# Altium PCB UC-527.PcbDoc
Units mil, origin at the board's own origin, x right, y up, seen from the top; angles counter-clockwise.
Board outline 984.25 x 944.88 mil, 2 copper layers (Top Layer, Bottom Layer); 27 components, 23 nets, 104 pads, 71 vias.
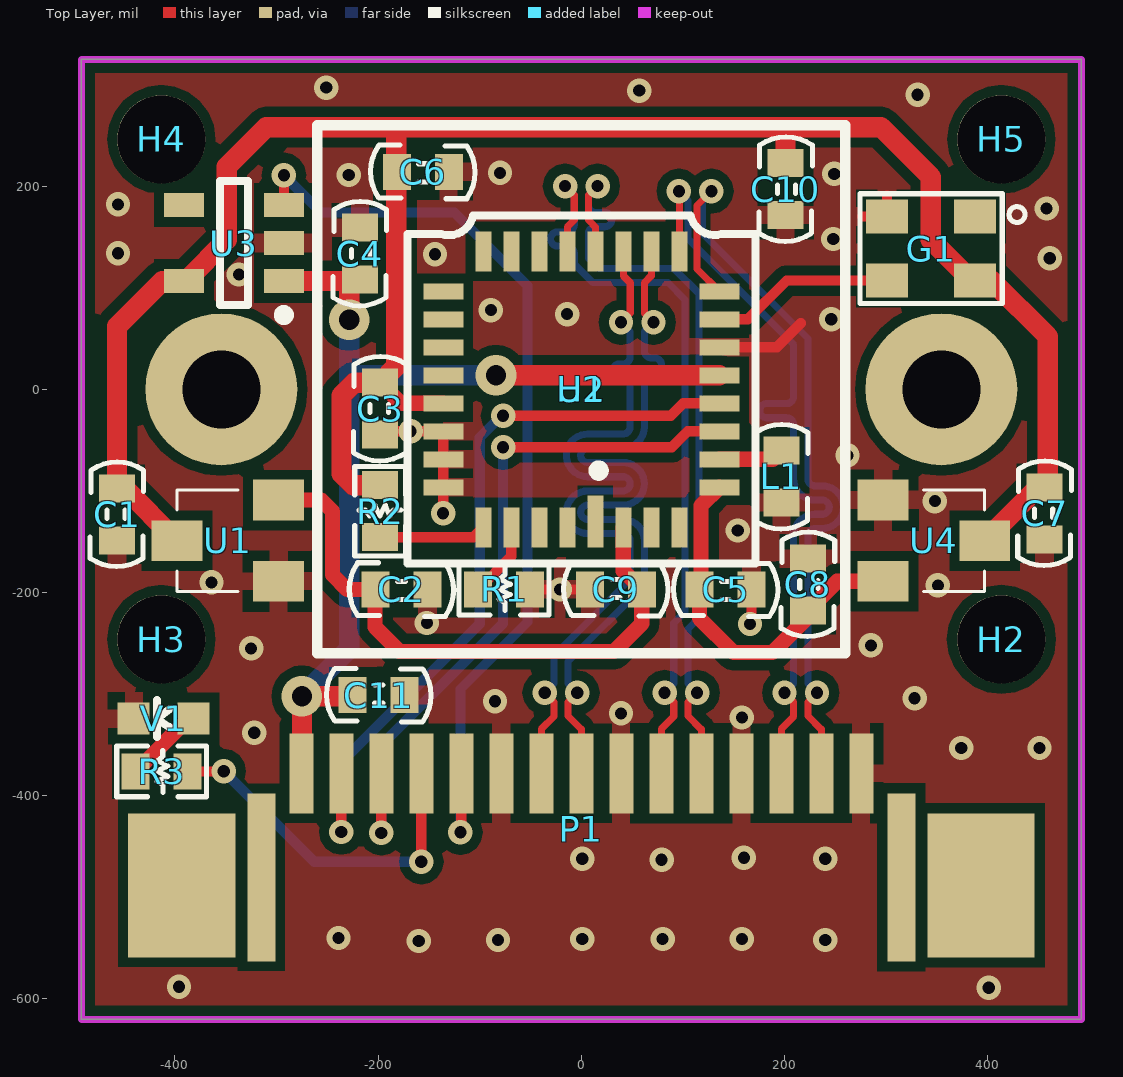
[diagram p0: Top Layer view]
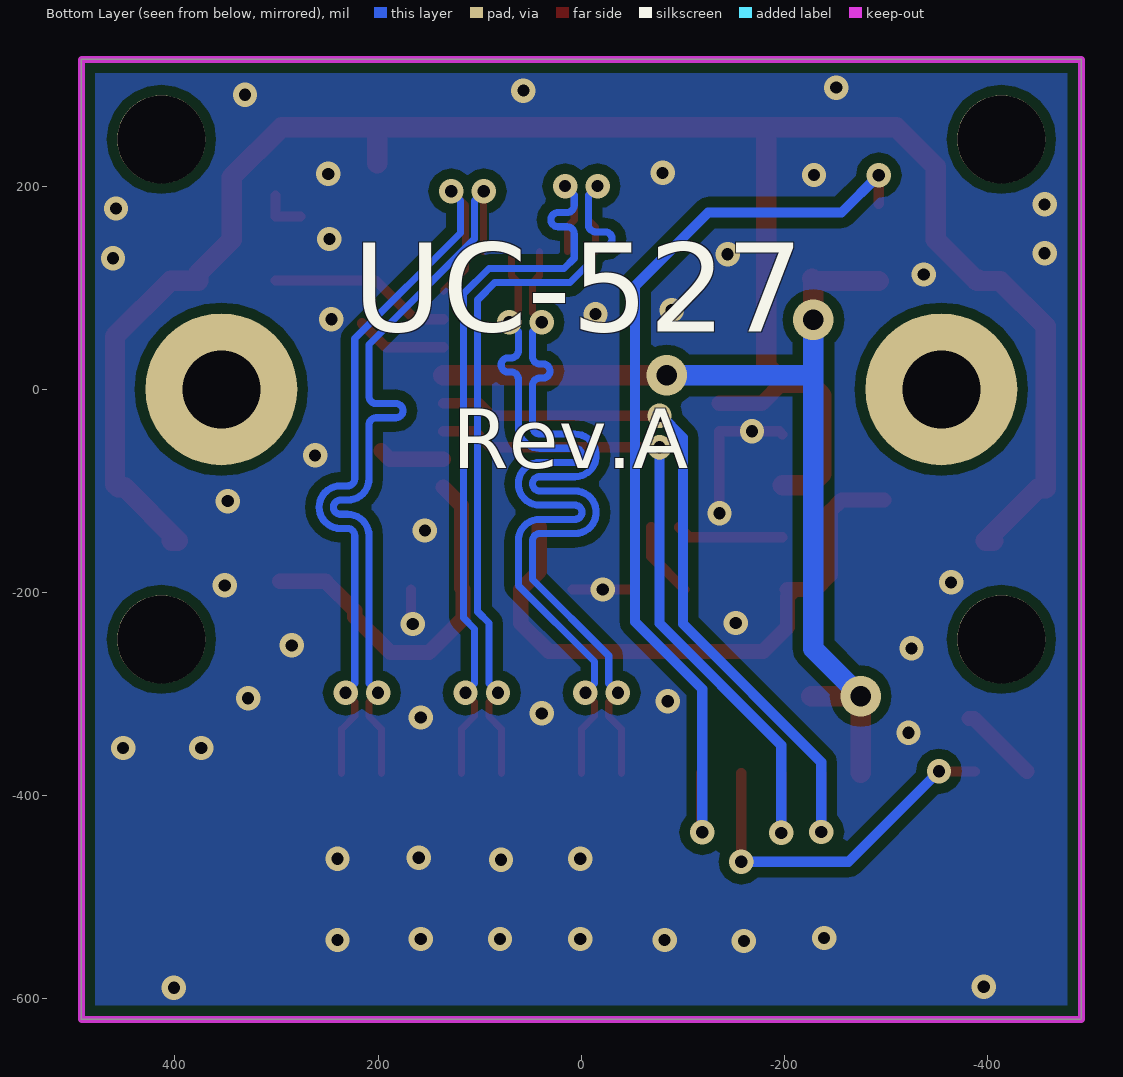
[diagram p1: Bottom Layer view, seen from below]

## Layer stack, top to bottom
Top Layer: signal copper 1.4
Dielectric: core 12.6, FR-4, Dk 4.8
Bottom Layer: signal copper 1.4

## Board outline
-492.13,-620.08 492.13,-620.08 492.13,324.8 -492.13,324.8

## Design rules (kind name [scope] priority, off if disabled: settings)
Clearance 板边 [OnLayer('Keep-Out Layer')] p1: gap=10
Clearance 固定孔 [(InComponent('H*'))] p2: gap=10
Clearance 差分对与其它走线 [(InDifferentialPairClass('All Differential Pairs')) vs not(InDifferentialPairClass('All Differential Pairs'))] p3 off: gap=21
Clearance 覆铜 [InPolygon] p4: gap=10
Clearance 普通间距 [All] p5: gap=6
ComponentClearance [All] p1 off: gap=10 collisioncheckmode=3 verticalgap=10 showdistances=FALSE
DiffPairsRouting [(InDifferentialPairClass('All Differential Pairs'))] p1: maxlimit=8 minlimit=7 mostfreqgap=7 maxuncoupledlength=500
FabricationTestPointUsage TestPointUsage [All] p1: valid=0 allowmultiple=FALSE
FabricationTestpoint Testpoint [All] p1: side=3 testpointundercomponent=TRUE minsize=40 maxsize=100 preferedsize=60 minholesize=0 maxholesize=40 preferedholesize=32 testpointgrid=1 allowsidetop=TRUE allowsidebottom=TRUE usegrid=TRUE gridtolerance=0.01
FanoutControl Fanout_LCC [All] p1 off: bgadir=Out bgaviamode=Centered fanoutstyle=Auto fanoutdirection=Alternating viagrid=1 // Protel DXP Scope 1 Expression Was: IsLCC   Fanout_LCC (Default Rule)
FanoutControl Fanout_BGA [All] p2 off: bgadir=Out bgaviamode=Centered fanoutstyle=Auto fanoutdirection=Alternating viagrid=1 // Protel DXP Scope 1 Expression Was: IsBGA   Fanout_BGA (Default Rule)
FanoutControl Fanout_SOIC [All] p3 off: bgadir=Out bgaviamode=Centered fanoutstyle=Auto fanoutdirection=Alternating viagrid=1 // Protel DXP Scope 1 Expression Was: IsSOIC   Fanout_SOIC (Default Rule)
FanoutControl Fanout_Default [All] p4: bgadir=Out bgaviamode=Centered fanoutstyle=Auto fanoutdirection=Alternating viagrid=1 // Fanout_Default (Default Rule)
FanoutControl Fanout_Small [All] p5 off: bgadir=Out bgaviamode=Centered fanoutstyle=Auto fanoutdirection=Alternating viagrid=1 // Protel DXP Scope 1 Expression Was: (CompPinCount < 5)   Fanout_Small (Default Rule)
HoleSize [All] p1: absolutevalues=TRUE maxlimit=130 minlimit=1 maxpercent=80.000 minpercent=20.000
Length [(InDifferentialPairClass('All Differential Pairs'))] p1 off: maxlimit=1120 minlimit=1080
MatchedLengths "within differential pair" [All] p1: tolerance=5 checknetsindiffpair=TRUE checkdiffpairvsdiffpair=FALSE checkothers=FALSE
MatchedLengths "between differential pairs" [All] p2: tolerance=5 checknetsindiffpair=FALSE checkdiffpairvsdiffpair=TRUE checkothers=FALSE
PlaneClearance [All] p1: clearance=15
PlaneConnect padPowerPlane [ispad] p1: planeconnectstyle=Relief reliefexpansion=15 reliefentries=4 reliefconductorwidth=15 reliefairgap=15
PlaneConnect viaPowerPlane [isvia] p2: planeconnectstyle=Direct reliefexpansion=15 reliefentries=4 reliefconductorwidth=15 reliefairgap=10
PolygonConnect 过孔全连接 [ISVIA] p1: connectstyle=Direct reliefconductorwidth=10 reliefentries=4 polygonreliefangle="90 Angle"
PolygonConnect [All] p2: connectstyle=Relief reliefconductorwidth=18 reliefentries=4 polygonreliefangle="90 Angle"
RoutingCorners 差分对 [(InNet('CAM_C_N') OR InNet('CAM_C_P') OR InNet('CAM_D0_N') OR InNet('CAM_D0_P') OR InNet('CAM_D1_N') OR InNet('CAM_D1_P'))] p1: cornerstyle=Round minsetback=100 maxsetback=100
RoutingCorners [All] p2: cornerstyle=45-Degree minsetback=100 maxsetback=100
RoutingPriority [(InDifferentialPairClass('All Differential Pairs'))] p1: routingpriority=0
RoutingVias [All] p1: holewidth=12 width=24 viastyle="Through Hole" minholewidth=12 minwidth=24 maxholewidth=236.22 maxwidth=236.22
SilkToSilkClearance [All] p1 off: silktosilkclearance=10
SilkscreenOverComponentPads [All] p1 off: minsilkscreentomaskgap=10
SolderMaskExpansion [All] p1: expansion=4
Width [All] p1: maxlimit=80 minlimit=6 preferedwidth=6
12 further rules are at their usual default settings.

## Classes and differential pairs
differential pair CAM_C: +CAM_C_P -CAM_C_N
differential pair CAM_D0: +CAM_D0_P -CAM_D0_N
differential pair CAM_D1: +CAM_D1_P -CAM_D1_N

## Components (designator, comment, footprint, x,y, rotation, side; value= is the part's Value field where it differs from the comment)
C1 "1u" 0603S-CAP -457,-123 r90 top
C2 "1u" 0603S-CAP -177,-197 r180 top
C3 "100n" 0603S-CAP -198,-19 r90 top
C4 "1u" 0603S-CAP -218,133.59 r270 top
C5 "100n" 0603S-CAP 142,-197 r180 top
C6 "1u" 0603S-CAP -156,214 r180 top
C7 "1u" 0603S-CAP 456,-122 r90 top
C8 "1u" 0603S-CAP 223,-192 r270 top
C9 "100n" 0603S-CAP 34,-197 r0 top
C10 "100n" 0603S-CAP 201,197 r270 top
C11 "1u" 0603S-CAP -199.41,-301 r0 top
G1 "27MHz" 爱普生晶振3.2×2.5MM 301,107.01 r180 top
H1 "FixedHole" 摄像头安装孔_18/20 0,0 r0 top locked
H2 "FixedHole" 固定孔 413.39,-246.06 r0 top
H3 "FixedHole" 固定孔 -413.39,-246.06 r0 top
H4 "FixedHole" 固定孔 -413.39,246.06 r0 top
H5 "FixedHole" 固定孔 413.39,246.06 r0 top
L1 "磁珠" L0603 197,-86 r270 top
P1 "Header 15" OV5647_MIPI 0,-433.07 r0 top locked
R1 "4.7K" 0603S-RES -76,-197.02 r180 top
R2 "10k" 0603S-RES -198,-120 r270 top
R3 "1.5k" 0603S-RES -413,-376 r180 top (schematic designator R6)
U1 "ME6206A15M3G-65E9-1.5V" SOT23-3 -298,-189 r270 top locked
U2 "OV5647" OV5647 0,0 r180 top locked
U3 "ME6211-3.0" SOT23-5 -342,144 r180 top (schematic designator U4)
U4 "ME6206A28M3G-65X6-2.8V" SOT23-3 297,-109 r90 top (schematic designator U3)
V1 "RUN" LED-0603 -411,-324 r90 top

## Footprints (in the part's own frame and the unit in brackets; to place one, negate y for a bottom-side part, rotate by r counter-clockwise, add the part's x,y. Pads: shape width x height; smd on the part's side, far side on the other; paste and mask are expansions set on the pad)
0603S-CAP [mm]
  rect 0.7x0.9 smd: 1(-0.65,0) 2(0.65,0)
  silkscreen extent -1.31,-0.67 1.31,0.67
0603S-RES [mm]
  rect 0.7x0.9 smd: 1(-0.65,0) 2(0.65,0)
  silkscreen extent -1.12,-0.64 1.12,0.64
L0603 [mm]
  rect 0.7x0.9 smd: 1(0.65,0) 2(-0.65,0)
  silkscreen extent -1.31,-0.67 1.31,0.67
LED-0603 [mm]
  rect 0.8x0.8 smd: 1(0,-0.75) 2(0,0.75)
  silkscreen extent -0.46,-0.14 0.46,0.17
OV5647 [mm]
  rect 0.4x1.3 smd: 1(-0.35,3.3)
  rect 0.4x1 smd: 2(-1.05,3.45) 3(-1.75,3.45) 4(-2.45,3.45) 13(-2.45,-3.45) 14(-1.75,-3.45) 15(-1.05,-3.45) 16(-0.35,-3.45) 17(0.35,-3.45) 18(1.05,-3.45) 19(1.75,-3.45) 20(2.45,-3.45) 29(2.45,3.45) 30(1.75,3.45) 31(1.05,3.45) 32(0.35,3.45)
  rect 1x0.4 smd: 5(-3.45,2.45) 6(-3.45,1.75) 7(-3.45,1.05) 8(-3.45,0.35) 9(-3.45,-0.35) 10(-3.45,-1.05) 11(-3.45,-1.75) 12(-3.45,-2.45) 21(3.45,-2.45) 22(3.45,-1.75) 23(3.45,-1.05) 24(3.45,-0.35) 25(3.45,0.35) 26(3.45,1.05) 27(3.45,1.75) 28(3.45,2.45)
  silkscreen extent -4.35,-4.35 4.35,4.35
OV5647_MIPI [mm]
  rect 2.68x3.6 smd: 0(-9.99,-1.4) 0(9.99,-1.4)
  rect 0.7x4.2 smd: 0(-8,-1.2) 0(8,-1.2)
  rect 0.6x2 smd: 1(-7,1.4) 2(-6,1.4) 3(-5,1.4) 4(-4,1.4) 5(-3,1.4) 6(-2,1.4) 7(-1,1.4) 8(0,1.4) 9(1,1.4) 10(2,1.4) 11(3,1.4) 12(4,1.4) 13(5,1.4) 14(6,1.4) 15(7,1.4)
SOT23-3 [mil]
  rect 40x50 smd: 1(0,0) 2(-80,0) 3(-40,-100)
  silkscreen extent -90,-100 10,-40, body extent -99,-96 19,2, height 42
SOT23-5 [mm] "SOT23, 5-Leads, Body 3.1x3.0mm (max), Pitch 0.95mm, IPC Medium Density"
  rect 1x0.6 smd: 1(-1.25,0.95) 2(-1.25,0) 3(-1.25,-0.95) 4(1.25,-0.95) 5(1.25,0.95)
  silkscreen extent -1.38,-1.55 0.35,1.92, body extent -0.9,-1.55 0.9,1.55, height 1.1
固定孔 [mm]
  round 2.2 hole 2.2: 1(0,0)
摄像头安装孔_18/20 [mm]
  round 3.8 hole 1.95: 1(-9,0) 1(9,0)
爱普生晶振3.2×2.5MM [mm]
  rect 1.05x0.85 smd: 1(-2.2,-1.6) 2(0,-1.6) 3(0,0) 4(-2.2,0)
  Top Layer pour cut-out: -2.878,0.572 -2.878,-2.172 0.678,-2.172 0.678,0.572
  silkscreen extent -3.44,-2.17 0.68,0.57

## Part data
C1 C2 C3 C4 C5 C6 C7 C8 C9: library part Cap, "50V/8.2u/0805"
C10 C11: library part CAP, "RC=1206"
G1: library part CTY4-B
H1 H2 H3 H4 H5: library part 固定孔
L1: library part RES
P1: "Header, 15-Pin"
R1 R2 R3: library part Res2, "Resistor"
U1 U4: library part 65e9
U3: library part PAM3101DAB150
V1: library part LED0, "Typical INFRARED GaAs LED"

## Via types
v1: diameter 24, hole 12, Top Layer to Bottom Layer, tented both sides, 68 vias
v2: diameter 40, hole 20, Top Layer to Bottom Layer, tented both sides, 3 vias

## Nets (pads, with @x,y where several pads share a name; then routed paths per layer and width w, separated by ;. In a path a pad name is that pad's centre, name@x,y a point inside that pad or via, vN(x,y) a via of type N, cw(c..) or ccw(c..) an arc to the next point about the centre after c; other vN are vias at no path point)
+3V3: C4.2 C11.1 P1.1 U2.9 U3.1 | length 983.1
  Top Layer w20: U3.1 -229.4,106.6 C4.2@-228.4,107.6 ; P1.1@-275,-377.36 v2(-275,-302) C11.1@-226,-302 ; v2(-228.4,68.4) C4.2@-228.4,107.6 ; C4.2@-227,109 C4.2@-228.4,107.6 ; v2(-84,13.78) U2.9
  Bottom Layer w20: v2(-275,-302) -228.4,-255.4 v2(-228.4,68.4) ; -227.18,13.78 v2(-84,13.78)
AGND: L1.2 U2.6 | length 64.7
  Top Layer w15: U2.6 188.51,-68.9 L1.2
AVDD(+2V8): C5.2 C8.2 U2.5 U4.2 | length 364.2
  Top Layer w15: U2.5 117.83,-114.45 117.83,-195.58 C5.2 116.41,-225.41 150,-259 188,-259 223,-224 C8.2 251.59,-189 U4.2
CAM_C_N: P1.8 U2.14 | length 792.5
  Top Layer w7: v1(-4,-298.63) -13,-307.63 -13,-321.63 -0.37,-334.26 0,-334.26 P1.8 ; U2.14 68.9,111.74 62.12,104.96 62.12,74.88 v1(71,66)
  Bottom Layer w7: v1(-4,-298.63) -13,-289.63 -13,-268 62,-193 62,-149 ccw(c41,-149) 41,-128 6.35,-128 cw(c6.35,-121) 6.35,-114 41,-114 ccw(c41,-93) 62,-93 ccw(c41,-93) 41,-72 6.35,-72 cw(c6.35,-65) 6.35,-58 41,-58 ccw(c41,-37) 62,-37 62,10 cw(c69,10) 69,17 71.95,17 ccw(c71.95,24) 78.95,24 ccw(c71.95,24) 71.95,31 69,31 cw(c69,38) 62,38 62,57 v1(71,66)
CAM_C_P: P1.7 U2.15 | length 792.5
  Top Layer w7: P1.7 -39.37,-334.26 -27,-321.89 -27,-307.63 v1(-36,-298.63) ; v1(39,66) 48.12,75.12 48.12,104.96 41.34,111.74 U2.15
  Bottom Layer w7: v1(-36,-298.63) -27,-289.63 -27,-262.2 48,-187.2 48,-149 ccw(c41,-149) 41,-142 6.35,-142 cw(c6.35,-121) 6.35,-100 41,-100 ccw(c41,-93) 48,-93 ccw(c41,-93) 41,-86 6.35,-86 cw(c6.35,-65) 6.35,-44 41,-44 ccw(c41,-37) 48,-37 48,4 ccw(c41,4) 41,11 37.86,11 cw(c37.86,18) 30.86,18 cw(c37.86,18) 37.86,25 41,25 ccw(c41,32) 48,32 48,57 v1(39,66)
CAM_D0_N: P1.14 U2.12 | length 792.5
  Top Layer w7: v1(128,195) 113.83,180.83 113.83,118.45 U2.12 ; v1(232,-298.63) 223,-307.63 223,-321.63 235.63,-334.26 236.22,-334.26 P1.14
  Bottom Layer w7: v1(128,195) 119,186 119,154 223,50 223,-88 ccw(c230,-88) 230,-95 237,-95 cw(c237,-116) 258,-116 cw(c237,-116) 237,-137 230,-137 ccw(c230,-144) 223,-144 223,-289.63 v1(232,-298.63)
CAM_D0_P: P1.13 U2.13 | length 792.5
  Top Layer w7: v1(96,195) 96.46,194.54 U2.13 ; P1.13 196.85,-334.26 209,-322.11 209,-307.63 v1(200,-298.63)
  Bottom Layer w7: v1(96,195) 105,186 105,148.2 209,44.2 209,-7 cw(c202,-7) 202,-14 182.52,-14 ccw(c182.52,-21) 175.52,-21 ccw(c182.52,-21) 182.52,-28 202,-28 cw(c202,-35) 209,-35 209,-88 ccw(c230,-88) 230,-109 237,-109 cw(c237,-116) 244,-116 cw(c237,-116) 237,-123 230,-123 ccw(c230,-144) 209,-144 209,-289.63 v1(200,-298.63)
CAM_D1_N: P1.11 U2.16 | length 792.5
  Top Layer w7: U2.16 13.78,159.74 7,166.52 7,191 v1(16,200) ; v1(114,-298.63) 105,-307.63 105,-321.63 117.63,-334.26 118.11,-334.26 P1.11
  Bottom Layer w7: v1(16,200) 7,191 7,181 ccw(c14,181) 14,174 22.97,174 cw(c22.97,167) 29.97,167 cw(c22.97,167) 22.97,160 14,160 ccw(c14,153) 7,153 7,129 17,119 91,119 116,94 116,-224.8 105,-235.8 105,-289.63 v1(114,-298.63)
CAM_D1_P: P1.10 U2.17 | length 792.5
  Top Layer w7: v1(-16,200) -7,191 -7,166.52 -13.78,159.74 U2.17 ; P1.10 78.74,-334.26 91,-322 91,-307.63 v1(82,-298.63)
  Bottom Layer w7: v1(-16,200) -7,191 -7,162 cw(c-14,162) -14,155 -23.28,155 ccw(c-23.28,148) -30.28,148 ccw(c-23.28,148) -23.28,141 -14,141 cw(c-14,134) -7,134 -7,123.2 11.2,105 85.2,105 102,88.2 102,-219 91,-230 91,-289.63 v1(82,-298.63)
DGND: C1.1 C2.1 C3.1 C4.1 C5.1 C6.1 C7.1 C8.1 C9.1 C10.2 C11.2 G1.2 L1.1 P1.6 P1.9 P1.12 P1.15 R1.1 U1.1 U2.10 U2.26 U2.27 U2.28 U3.2 U4.1 V1.2 | length 374
  Top Layer w10: C3.1 -194.75,-41.34 v1(-168,-41.34) U2.26 U2.27 U2.28 ; v1@-135.83,-121.83 U2.28 ; U2.28@-135.83,-97.83 U2.28 ; R1.1 v1(-21,-197.02) C9.1@8.39,-197.02 ; U2.10 192.38,41.34 216,64.96 ; v1(166,-231) 167.59,-229.41 C5.1 ; 276.31,170 G1.2 301,190.5
  other v1: 401,-589 -396,-588 -160,-543 -82,-542 240,-542 1,-541 80,-541 158,-541 -239,-540 79,-463 1,-462 240,-462 160,-461 374,-353 451,-353 -322,-338 158,-323 39,-319 -85,-307 328,-304 -325,-255 285,-252 -152,-230 351,-193 -364,-190 154,-139 -136,-122 348,-110 262,-65 246,69 -14,74 -89,78 -337,113 461,129 -144,133 -456,134 248,148 458,178 -456,182 -229,211 249,212 -80,213 331,290 57,294 -251,297
DOVDD(+3V): C1.2 C3.2 C6.2 C7.2 C10.1 G1.4 R2.1 U1.3 U2.25 U3.5 U4.3 | length 2175.4
  Top Layer w15: C3.2 -177.63,-13.78 U2.25
  Top Layer w20: U1.3@-405.41,-149 U1.3 -449.59,-97.41 C1.2 -457,62 -412.4,106.6 U3.5 -389.4,106.6 U3.5@-388,108 ; U3.5@-391.21,108 U3.5@-388,108 ; R2.1 -224.59,-94.41 -236,-83 -236,-6 -223.41,6.59 C3.2 -182,22.59 -182,214 -182,256 ; C10.1 201,256 ; U4.3@403.41,-149 U4.3 449.59,-96.41 C7.2 459,-93.41 459,52 403.99,107.01 G1.4 376.99,107.01 376.99,114.01 344,147 344,209 295,258 -310,258 -349,219 -349,147 U3.5@-388,108
DVDD(+1V5): C2.2 C9.2 U1.2 U2.2 | length 604.8
  Top Layer w15: U1.2@-287,-109 U1.2 -256,-109 -245,-120 -245,-182.5 -230.5,-197 C2.2 ; C2.2@-209.5,-197.5 -206.3,-200.71 -203,-204 -203,-234 -179,-258 32,-258 59.59,-230.41 C9.2 41.34,-178.75 U2.2
FREX: U2.31
LED_EN: P1.4 R3.1 | length 353.8
  Top Layer w10: R3.1 v1(-352,-376) ; v1(-157.48,-465) P1.4
  Bottom Layer w10: v1(-352,-376) -263,-465 v1(-157.48,-465)
NetR3_2: R3.2 V1.1 | length 78.6
  Top Layer w15: R3.2 -386.59,-324 V1.1
POWER_EN: P1.5 U3.3 | length 935.7
  Top Layer w10: U3.3@-292.79,182.4 v1(-292.79,210.79) ; v1@-118.11,-435.11 P1.5
  Bottom Layer w10: v1(-292.79,210.79) -256,174 -125,174 -53,102 -53,-229 -119,-295 v1(-119,-436)
PWDN: R1.2 U2.30 | length 74.7
  Top Layer w10: R1.2 -68.9,-164.32 U2.30
RESET_B: R2.2 U2.29 | length 105.6
  Top Layer w10: R2.2 -106.22,-145.59 U2.29
SIOC: P1.3 U2.7 | length 707.3
  Top Layer w10: v1(-196.85,-436.63) P1.3 ; v1(-77,-57) 89,-57 104.66,-41.34 U2.7
  Bottom Layer w10: v1(-196.85,-436.63) -196.85,-350.22 -77,-230.37 v1(-77,-57)
SIOD: P1.2 U2.8 | length 752.2
  Top Layer w10: v1(-236.22,-435.7) P1.2 ; v1(-77,-26) 88,-26 100.22,-13.78 U2.8
  Bottom Layer w10: v1(-236.22,-435.7) -236.22,-366.97 -100,-230.75 -100,-47.47 -78.53,-26 v1(-77,-26)
STROBE: U2.32
VSYNC: U2.23
XVCLK: G1.3 U2.11 | length 181
  Top Layer w10: U2.11 163.9,68.9 202.01,107.01 G1.3
pads on no net: G1.1 H1.1 H2.1 H3.1 H4.1 H5.1 P1.0 U2.1 U2.3 U2.4 U2.18 U2.19 U2.20 U2.21 U2.22 U2.24 U3.4

## Polygon pours and split planes (outlines as drawn)
DGND on Bottom Layer "Keep-Out Layer-No Net 1" (solid, remove dead copper, pour order 1001): -492.13,-620.08 492.13,-620.08 492.13,324.8 -492.13,324.8
DGND on Top Layer "Keep-Out Layer-No Net" (solid, remove dead copper, pour order 1000): -490.45,-619.24 493.81,-619.24 493.81,325.65 -490.45,325.65

## Keep-outs
Keep-Out Layer:
  the board outline again, w7

## Silkscreen, mask and mechanical layers (free items; w line width, h text height)
Top Overlay:
  lines w10: -259.84,-259.84 -259.84,259.84 259.84,259.84 259.84,-259.84 -259.84,-259.84
Bottom Overlay:
  text "UC-527" at 225,28 h150
  text "Rev.A" at 127,-97 h100
Mechanical 1:
  the board outline again, w7
Mechanical 2:
  lines w7: -413.39,1 -393.7,1 ; -393.7,-18.68 -393.7,1 ; -393.7,20.69 -393.7,1 ; -354.33,-18.68 -354.33,1 ; -354.33,20.69 -354.33,1 ; -334.65,1 -354.33,1 ; 334.65,1 354.33,1 ; 354.33,-18.68 354.33,1 ; 354.33,20.69 354.33,1 ; 393.7,-18.68 393.7,1 ; 393.7,20.69 393.7,1 ; 413.39,1 393.7,1 ; -393.7,1 -374.02,1 -354.33,1 ; 354.33,1 374.02,1 393.7,1
  lines w10: -373.44,-33.04 cw(c-393.7,1) -373.32,34.97 ; -372.96,-33.85 ccw(c-354.09,1) -369.8,37.38 ; 374.59,-33.04 cw(c354.33,1) 374.71,34.97 ; 375.07,-33.85 ccw(c393.95,1) 378.24,37.38
Mechanical 5:
  circle w8: c277.29,139.83 r12.59
  lines w7.87: 294.2,108.31 294.2,37.91 ; 294.63,108.31 314.5,88.44 320.97,94.92 295.49,120.4 ; 294.63,120.4 255.33,120.4 229.84,94.92 235.89,88.87 255.76,108.74 255.76,37.91 269.58,37.91 269.58,64.68 280.38,64.68 280.38,37.91 294.2,37.91 ; 294.2,37.91 294.2,37.91 ; 212.57,20.2 212.57,165.75 340.84,165.75 340.84,20.2 212.57,20.2
  lines w10: -39.37,0 39.37,0 ; 0,-39.37 0,39.37 ; -167.32,-167.32 -167.32,167.32 167.32,167.32 167.32,-167.32 -167.32,-167.32

## Dimensions
-393.7,-18.68 to 393.7,-18.68 on Mechanical 2
354.33,-18.68 to -354.33,1 on Mechanical 2